# Altium PCB ClockBooster.PcbDoc
Units mil, origin at the board's own origin, x right, y up, seen from the top; angles counter-clockwise.
Board outline 420 x 570 mil, 2 copper layers (Top Layer, Bottom Layer); 11 components, 9 nets, 34 pads, 4 vias.
Unrouted connection lines stored in the file: 1.
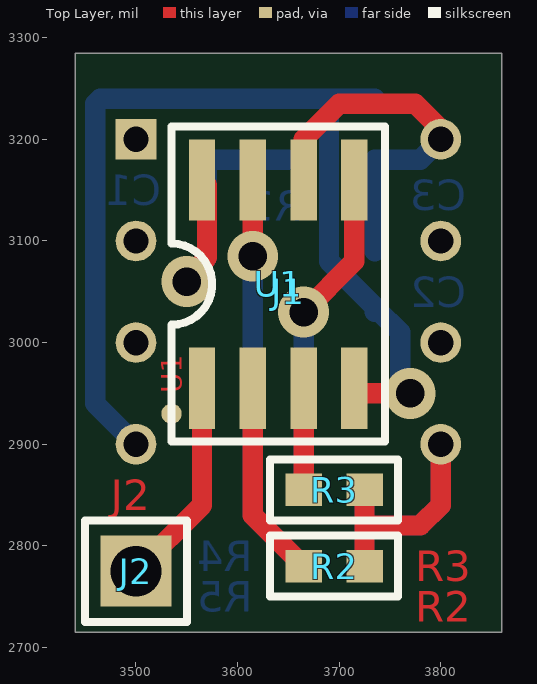
[diagram p0: Top Layer view]
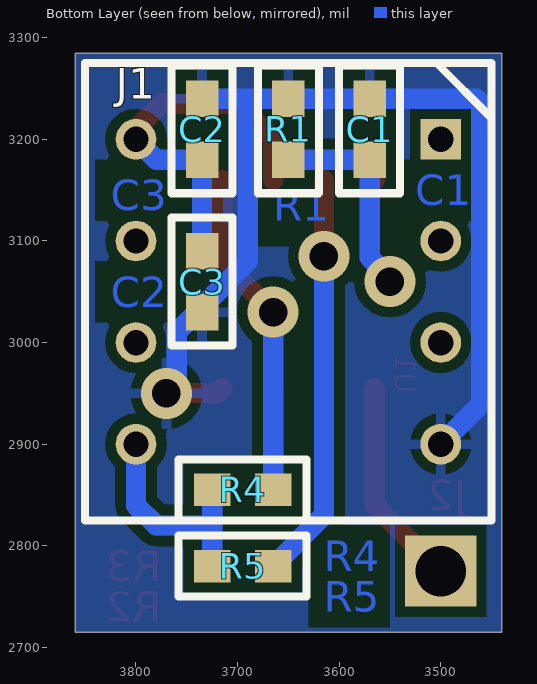
[diagram p1: Bottom Layer view, seen from below]

## Layer stack, top to bottom
Top Layer: signal copper 1.4
Dielectric: dielectric 12.6, FR-4, Dk 4.8
Bottom Layer: signal copper 1.4

## Board outline
3440,3285 3860,3285 3860,2715 3440,2715 3440,3285

## Design rules (kind name [scope] priority, off if disabled: settings)
Clearance [All] p1: gap=10
MinimumSolderMaskSliver [All] p1: minsoldermaskwidth=0
PolygonConnect [All] p1: connectstyle=Relief reliefconductorwidth=10 reliefentries=4 polygonreliefangle="90 Angle"
RoomDefinition ClockBooster [InComponentClass('ClockBooster')] p1: confinementstyle=ConfineIn formatcopy=TRUE lockcomponents=FALSE outline 3370,2660 3985,2660 3985,3330 3370,3330
RoutingVias [All] p1: holewidth=28 width=25 viastyle="Through Hole" minholewidth=28 minwidth=25 maxholewidth=28 maxwidth=50
SilkToSilkClearance [All] p1: silktosilkclearance=0
SilkscreenOverComponentPads [All] p1: minsilkscreentomaskgap=5
SolderMaskExpansion [All] p1: expansion=4
Width [All] p1: maxlimit=100 minlimit=10 preferedwidth=40
25 further rules are at their usual default settings.

## Components (designator, comment, footprint, x,y, rotation, side; value= is the part's Value field where it differs from the comment)
C1 "12pF" 0603 3570,3240 r270 bottom
C2 "22uF - GRM188R60G226MEA0L" 0603 3735,3240 r270 bottom
C3 "100nF" 0603 3735,3030 r90 bottom
J1 "Dip 8 header" DIP8Header 3500,3200 r0 top
J2 "Header1" HDR1 3500,2775 r0 top
R1 "Res0603" 0603 3650,3240 r270 bottom
R2 "Res0603" 0603 3725,2780 r180 top
R3 "Res0603" 0603 3725,2855 r180 top
R4 "Res0603" 0603 3725,2855 r180 bottom
R5 "Res0603" 0603 3725,2780 r180 bottom
U1 "CDCVF2505" SO8 3565,2955 r90 top

## Footprints (in the part's own frame and the unit in brackets; to place one, negate y for a bottom-side part, rotate by r counter-clockwise, add the part's x,y. Pads: shape width x height; smd on the part's side, far side on the other; paste and mask are expansions set on the pad)
0603 [mil]
  rect 36x32 smd: 1(0,0) 2(60,0)
  silkscreen extent -33,-30 93,30
DIP8Header [mil] "8 PIN DIP HEADER"
  rect 40x40 hole 25: 1(0,0)
  round 40 hole 25: 2(0,-100) 3(0,-200) 4(0,-300) 5(300,-300) 6(300,-200) 7(300,-100) 8(300,0)
HDR1 [mil]
  rect 70x70 hole 50: 1(0,0)
  silkscreen extent -50,-50 50,50
SO8 [mil]
  rect 80x26 smd: 1(0,0) 2(0,-50) 3(0,-100) 4(0,-150) 5(205,-150) 6(205,-100) 7(205,-50) 8(205,0)
  silkscreen extent -52,-180 258,30

## Part data
C1 C2 C3: library part Cap0603, "Capacitor, Ceramic, 0603"
J1: library part DIP8Header
J2: "TestPoint1"
R1 R2 R3 R4 R5: "Resistor"
U1: "PLL 24->200Mhz PLL"

## Free pads (board coordinates)
  round 20 smd: 2(3535,2930)

## Via types
v1: diameter 50, hole 28, Top Layer to Bottom Layer, 4 vias

## Nets (pads, with @x,y where several pads share a name; then routed paths per layer and width w, separated by ;. In a path a pad name is that pad's centre, name@x,y a point inside that pad or via, vN(x,y) a via of type N, cw(c..) or ccw(c..) an arc to the next point about the centre after c; other vN are vias at no path point)
3V3: C2.2 C3.2 J1.8 U1.6 | length 373.1
  Top Layer w20: U1.6 3665,3200 3700,3235 3775,3235 3800,3210 J1.8
  Bottom Layer w20: C3.2 C2.2 3780,3180 J1.8
BOARDCLOCK: J1.5 R2.1 R3.1 R4.1 R5.1 | length 436.6
  Top Layer w20: R2.1 3725,2820 ; R3.1 3725,2820 ; J1.5 3800,2840 3780,2820 3725,2820
  Bottom Layer w20: R5.1 3725,2820 ; R4.1 3725,2820 ; J1.5 3800,2840 3780,2820 3725,2820
GND: C1.1 C2.1 C3.1 J1.4 pad.2 R1.1 U1.4 | length 996.2
  Top Layer w20: U1.4 3720,2950 v1(3770,2950)
  Bottom Layer w20: J1.4 3460,2940 3460,3235 3465,3240 C1.1 R1.1 3690,3240 ; C3.1 3735,3035 3690,3080 3690,3240 ; C2.1 3690,3240 ; C3.1@3737.5,3032.5 3760,3010 v1@3760,2960
NetC1_2: C1.2 R1.2 U1.8 | length 318.6
  Top Layer w20: v1(3550,3060) 3550,3063.64 3570,3083.64 3570,3155 U1.8
  Bottom Layer w20: v1(3550,3060) 3550,3063.64 3570,3083.64 C1.2 R1.2
NetJ2_1: J2.1 U1.1 | length 206.9
  Top Layer w20: J2.1 3565,2840 U1.1
NetR2_2: R2.2 U1.2 | length 195.7
  Top Layer w20: U1.2 3615,2830 R2.2
NetR3_2: R3.2 U1.3 | length 100
  Top Layer w20: R3.2 U1.3
NetR4_2: R4.2 U1.5 | length 325.7
  Top Layer w20: v1(3665,3030) 3715,3080 U1.5
  Bottom Layer w20: R4.2 v1(3665,3030)
NetR5_2: R5.2 U1.7 | length 400.7
  Top Layer w20: v1(3615,3085) U1.7
  Bottom Layer w20: v1(3615,3085) 3615,2830 R5.2
pads on no net: J1.1 J1.2 J1.3 J1.6 J1.7

## Polygon pours and split planes (outlines as drawn)
GND on Bottom Layer "TopOverlay-No Net" (solid, pour order 2): 3440,3285 3860,3285 3860,2715 3440,2715